# EAGLE board Demo Board v2 (EAGLE 7.4.0)
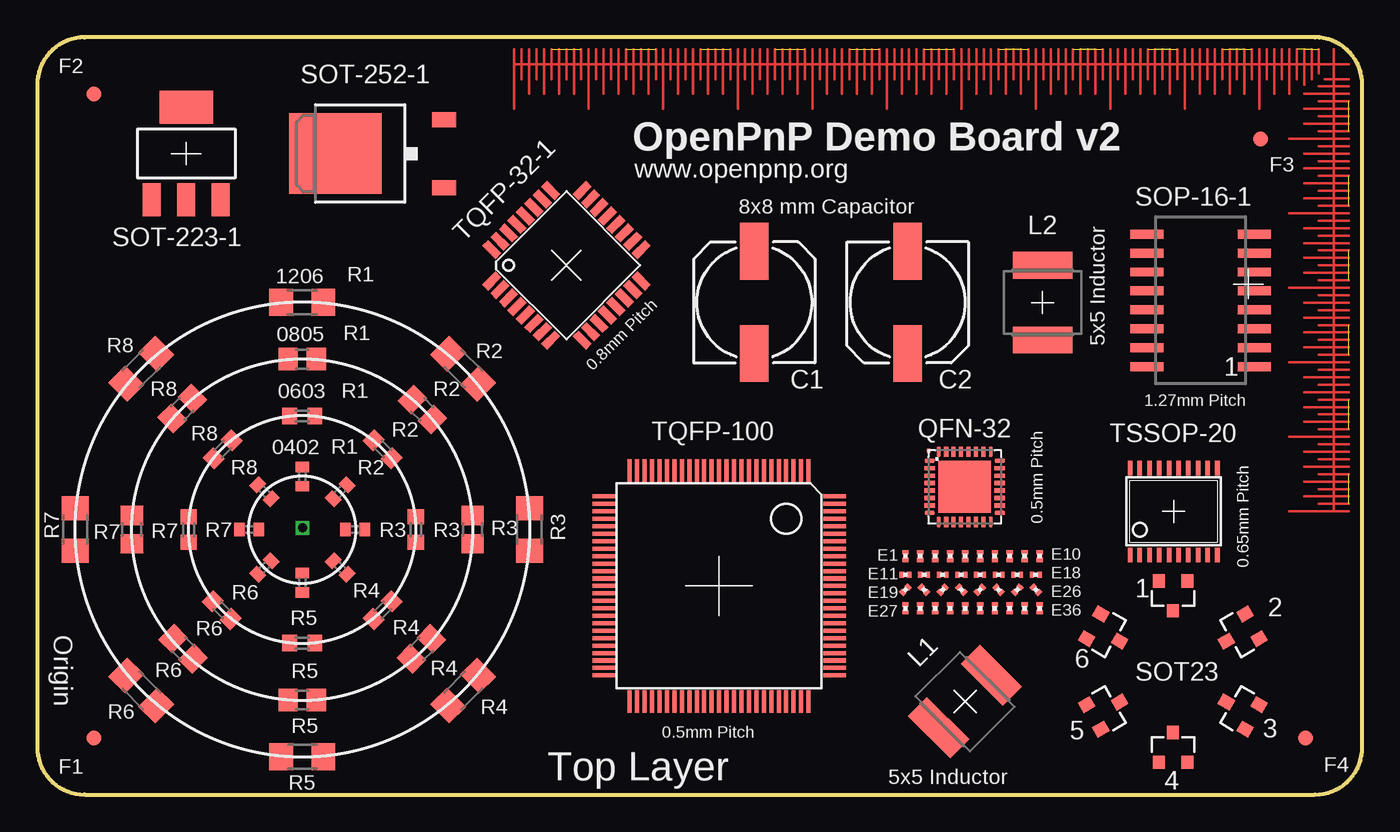
[diagram p0: board, top side]
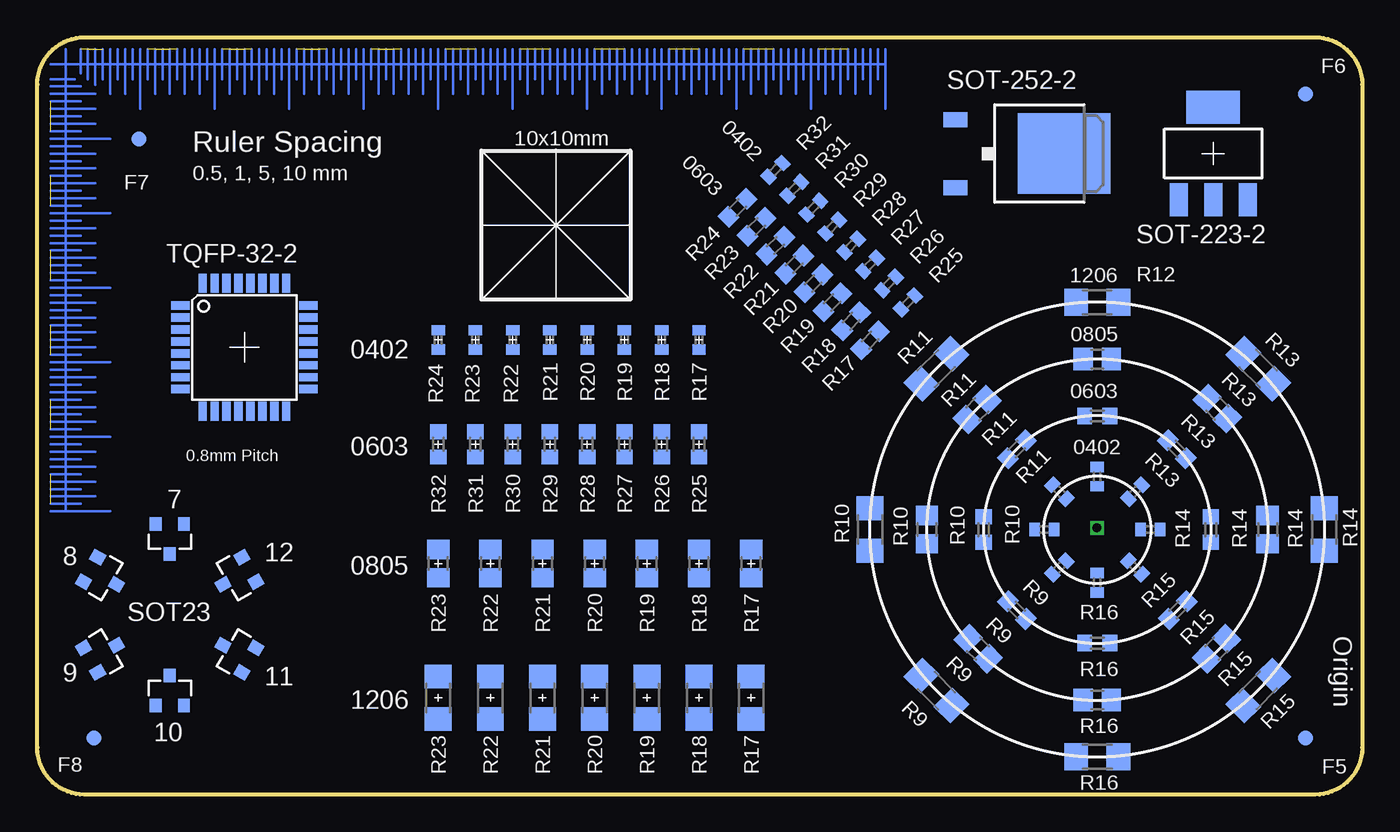
[diagram p1: board, bottom side, seen from below]

Size 88.9 x 50.8 mm. Coordinates in mm from the lower left corner, seen from the top.
Outline: 0,47.62 0,3.17 arc90 3.17,0 85.72,0 arc90 88.9,3.17 88.9,47.62 arc90 85.72,50.8 3.17,50.8 arc90 0,47.62
Copper layers (1*16): Top 0.035mm / dielectric 1.5mm / Bottom 0.035mm
Design rules "SeeedStudio_2layer_DRU_no_angle_20140221": minimum track width 6mil, minimum drill 12mil, track to track 6mil, track to pad 6mil, pad to pad 6mil, via to via 6mil, smd to smd 0mil, copper to edge 10mil, drill to drill 10mil, minimum pad ring 10mil, minimum via ring 6mil, stop-mask expansion 2mil, vias tented up to drill 100mil, thermal gap 10mil

## Footprints (pad centres in the part's own frame; a part is rotated, then mirrored left to right if it is on the bottom)
ELECTRO-SMD-E-7.8MM = smd 3.81 x 1.905: + 3.429,0; - -3.429,0
R0201 = smd 0.28 x 0.43: 1 -0.255,0; 2 0.255,0
FIDUCIAL_1MM = smd 1 x 1: 1 0,0
L5650M = smd 1.8 x 4: 1 -2.5,0; 2 2.5,0
HVQFN32 = smd 0.7 x 0.28: 1 -2.35,1.75; 2 -2.35,1.25; 3 -2.35,0.75; 4 -2.35,0.25; 5 -2.35,-0.25; 6 -2.35,-0.75; 7 -2.35,-1.25; 8 -2.35,-1.75; 17 2.35,-1.75; 18 2.35,-1.25; 19 2.35,-0.75; 20 2.35,-0.25; 21 2.35,0.25; 22 2.35,0.75; 23 2.35,1.25; 24 2.35,1.75 | smd 0.28 x 0.7: 9 -1.75,-2.35; 10 -1.25,-2.35; 11 -0.75,-2.35; 12 -0.25,-2.35; 13 0.25,-2.35; 14 0.75,-2.35; 15 1.25,-2.35; 16 1.75,-2.35; 25 1.75,2.35; 26 1.25,2.35; 27 0.75,2.35; 28 0.25,2.35; 29 -0.25,2.35; 30 -0.75,2.35; 31 -1.25,2.35; 32 -1.75,2.35 | smd 3.5 x 3.5: EXP 0,0 | smd 0.25 x 0.25: M1 -2.415,2.415
R0402 = smd 0.7 x 0.9: 1 -0.65,0; 2 0.65,0
R0603 = smd 1 x 1.1: 1 -0.85,0; 2 0.85,0
R0805 = smd 1.3 x 1.5: 1 -0.95,0; 2 0.95,0
R1206 = smd 1.6 x 1.803: 1 -1.422,0; 2 1.422,0
SOP16 = smd 0.6 x 2.2: 1 -4.445,-3.6; 2 -3.175,-3.6; 3 -1.905,-3.6; 4 -0.635,-3.6; 5 0.635,-3.6; 6 1.905,-3.6; 7 3.175,-3.6; 8 4.445,-3.6; 9 4.445,3.6; 10 3.175,3.6; 11 1.905,3.6; 12 0.635,3.6; 13 -0.635,3.6; 14 -1.905,3.6; 15 -3.175,3.6; 16 -4.445,3.6
SOT23-3 = smd 0.8 x 0.9: 1 -0.95,-1; 2 0.95,-1; 3 0,1
SOT223 = smd 1.219 x 2.235: 1 -2.311,-3.099; 2 0,-3.099; 3 2.311,-3.099 | smd 3.6 x 2.2: 4 0,3.099
TO-252 = smd 1 x 1.6: 1 -2.28,-4.8; 2 2.28,-4.8 | smd 5.4 x 6.2: 3 0,2.5
TQFP32-08 = smd 1.27 x 0.559: 1 -4.293,2.8; 2 -4.293,2; 3 -4.293,1.2; 4 -4.293,0.4; 5 -4.293,-0.4; 6 -4.293,-1.2; 7 -4.293,-2; 8 -4.293,-2.8; 17 4.293,-2.8; 18 4.293,-2; 19 4.293,-1.2; 20 4.293,-0.4; 21 4.293,0.4; 22 4.293,1.2; 23 4.293,2; 24 4.293,2.8 | smd 0.559 x 1.27: 9 -2.8,-4.293; 10 -2,-4.293; 11 -1.2,-4.293; 12 -0.4,-4.293; 13 0.4,-4.293; 14 1.2,-4.293; 15 2,-4.293; 16 2.8,-4.293; 25 2.8,4.293; 26 2,4.293; 27 1.2,4.293; 28 0.4,4.293; 29 -0.4,4.293; 30 -1.2,4.293; 31 -2,4.293; 32 -2.8,4.293
TQFP100 = smd 0.27 x 1.5: 1 -6,-7.75; 2 -5.5,-7.75; 3 -5,-7.75; 4 -4.5,-7.75; 5 -4,-7.75; 6 -3.5,-7.75; 7 -3,-7.75; 8 -2.5,-7.75; 9 -2,-7.75; 10 -1.5,-7.75; 11 -1,-7.75; 12 -0.5,-7.75; 13 0,-7.75; 14 0.5,-7.75; 15 1,-7.75; 16 1.5,-7.75; 17 2,-7.75; 18 2.5,-7.75; 19 3,-7.75; 20 3.5,-7.75; 21 4,-7.75; 22 4.5,-7.75; 23 5,-7.75; 24 5.5,-7.75; 25 6,-7.75; 51 6,7.75; 52 5.5,7.75; 53 5,7.75; 54 4.5,7.75; 55 4,7.75; 56 3.5,7.75; 57 3,7.75; 58 2.5,7.75; 59 2,7.75; 60 1.5,7.75; 61 1,7.75; 62 0.5,7.75; 63 0,7.75; 64 -0.5,7.75; 65 -1,7.75; 66 -1.5,7.75; 67 -2,7.75; 68 -2.5,7.75; 69 -3,7.75; 70 -3.5,7.75; 71 -4,7.75; 72 -4.5,7.75; 73 -5,7.75; 74 -5.5,7.75; 75 -6,7.75 | smd 1.5 x 0.27: 26 7.75,-6; 27 7.75,-5.5; 28 7.75,-5; 29 7.75,-4.5; 30 7.75,-4; 31 7.75,-3.5; 32 7.75,-3; 33 7.75,-2.5; 34 7.75,-2; 35 7.75,-1.5; 36 7.75,-1; 37 7.75,-0.5; 38 7.75,0; 39 7.75,0.5; 40 7.75,1; 41 7.75,1.5; 42 7.75,2; 43 7.75,2.5; 44 7.75,3; 45 7.75,3.5; 46 7.75,4; 47 7.75,4.5; 48 7.75,5; 49 7.75,5.5; 50 7.75,6; 76 -7.75,6; 77 -7.75,5.5; 78 -7.75,5; 79 -7.75,4.5; 80 -7.75,4; 81 -7.75,3.5; 82 -7.75,3; 83 -7.75,2.5; 84 -7.75,2; 85 -7.75,1.5; 86 -7.75,1; 87 -7.75,0.5; 88 -7.75,0; 89 -7.75,-0.5; 90 -7.75,-1; 91 -7.75,-1.5; 92 -7.75,-2; 93 -7.75,-2.5; 94 -7.75,-3; 95 -7.75,-3.5; 96 -7.75,-4; 97 -7.75,-4.5; 98 -7.75,-5; 99 -7.75,-5.5; 100 -7.75,-6
TSSOP20 = smd 0.305 x 0.991: 1 -2.925,-2.918; 2 -2.275,-2.918; 3 -1.625,-2.918; 4 -0.975,-2.918; 5 -0.325,-2.918; 6 0.325,-2.918; 7 0.975,-2.918; 8 1.625,-2.918; 9 2.275,-2.918; 10 2.925,-2.918; 11 2.925,2.918; 12 2.275,2.918; 13 1.625,2.918; 14 0.975,2.918; 15 0.325,2.918; 16 -0.325,2.918; 17 -0.975,2.918; 18 -1.625,2.918; 19 -2.275,2.918; 20 -2.925,2.918

## Placement (x,y rotation side)
BOTTOM_RULER_ORGIN  [REFERENCE_BOTTOM]  87,49 0 bottom
BOTTOM_RULER_ORGIN1  [REFERENCE_BOTTOM]  87,49 0 top
C1  [ELECTRO-SMD-E-7.8MM]  48.11,33.02 90 top
C2  [ELECTRO-SMD-E-7.8MM]  58.4,33.02 270 top
E1  [R0201]  58.25,16 90 top
E10  [R0201]  67.25,16 90 top
E11  [R0201]  58.25,14.75 180 top
E18  [R0201]  67,14.75 180 top
E27  [R0201]  58.25,12.5 90 top
E36  [R0201]  67.25,12.5 90 top
E$2  [R0201]  59.25,16 90 top
E$3  [R0201]  60.25,16 90 top
E$4  [R0201]  61.25,16 90 top
E$5  [R0201]  62.25,16 90 top
E$6  [R0201]  63.25,16 90 top
E$7  [R0201]  64.25,16 90 top
E$8  [R0201]  65.25,16 90 top
E$9  [R0201]  66.25,16 90 top
E$12  [R0201]  59.5,14.75 180 top
E$13  [R0201]  60.75,14.75 180 top
E$14  [R0201]  62,14.75 180 top
E$15  [R0201]  63.25,14.75 180 top
E$16  [R0201]  64.5,14.75 180 top
E$17  [R0201]  65.75,14.75 180 top
E$19  [R0201]  58.25,13.75 45 top
E$20  [R0201]  59.5,13.75 135 top
E$21  [R0201]  60.75,13.75 45 top
E$22  [R0201]  62,13.75 135 top
E$23  [R0201]  63.25,13.75 45 top
E$24  [R0201]  64.5,13.75 135 top
E$25  [R0201]  65.75,13.75 45 top
E$26  [R0201]  67,13.75 135 top
E$28  [R0201]  59.25,12.5 90 top
E$29  [R0201]  60.25,12.5 90 top
E$30  [R0201]  61.25,12.5 90 top
E$31  [R0201]  62.25,12.5 90 top
E$32  [R0201]  63.25,12.5 90 top
E$33  [R0201]  64.25,12.5 90 top
E$34  [R0201]  65.25,12.5 90 top
E$35  [R0201]  66.25,12.5 90 top
FID-1  [FIDUCIAL_1MM]  3.81,3.81 0 top
FID-2  [FIDUCIAL_1MM]  3.81,46.99 0 top
FID-3  [FIDUCIAL_1MM]  82.09,43.99 0 top
FID-4  [FIDUCIAL_1MM]  85.09,3.81 0 top
FID-5  [FIDUCIAL_1MM]  3.81,3.81 0 bottom
FID-6  [FIDUCIAL_1MM]  3.81,46.99 0 bottom
FID-7  [FIDUCIAL_1MM]  82.09,43.99 0 bottom
FID-8  [FIDUCIAL_1MM]  85.09,3.81 0 bottom
L1  [L5650M]  62.25,6.25 45 top
L2  [L5650M]  67.45,33 270 top
QFN-32  [HVQFN32]  62.23,20.65 0 top
R0402-1  [R0402]  17.78,21.34 270 top
R0402-2  [R0402]  20.32,20.32 45 top
R0402-3  [R0402]  21.34,17.78 0 top
R0402-4  [R0402]  20.32,15.24 135 top
R0402-5  [R0402]  17.78,14.22 90 top
R0402-6  [R0402]  15.24,15.24 45 top
R0402-7  [R0402]  14.22,17.78 180 top
R0402-8  [R0402]  15.24,20.32 135 top
R0402-9  [R0402]  20.32,15.24 45 bottom
R0402-10  [R0402]  21.34,17.78 0 bottom
R0402-11  [R0402]  20.32,20.32 315 bottom
R0402-12  [R0402]  17.78,21.34 270 bottom
R0402-13  [R0402]  15.24,20.32 45 bottom
R0402-14  [R0402]  14.22,17.78 180 bottom
R0402-15  [R0402]  15.24,15.24 315 bottom
R0402-16  [R0402]  17.78,14.22 90 bottom
R0402-17  [R0402]  44.5,30.5 270 bottom
R0402-18  [R0402]  47,30.5 270 bottom
R0402-19  [R0402]  49.5,30.5 270 bottom
R0402-20  [R0402]  52,30.5 270 bottom
R0402-21  [R0402]  54.5,30.5 270 bottom
R0402-22  [R0402]  57,30.5 270 bottom
R0402-23  [R0402]  59.5,30.5 270 bottom
R0402-24  [R0402]  62,30.5 270 bottom
R0402-25  [R0402]  30.48,33.02 225 bottom
R0402-26  [R0402]  31.75,34.29 225 bottom
R0402-27  [R0402]  33.02,35.56 225 bottom
R0402-28  [R0402]  34.29,36.83 225 bottom
R0402-29  [R0402]  35.56,38.1 225 bottom
R0402-30  [R0402]  36.83,39.37 225 bottom
R0402-31  [R0402]  38.1,40.64 225 bottom
R0402-32  [R0402]  39.37,41.91 225 bottom
R0603-1  [R0603]  17.78,25.4 180 top
R0603-2  [R0603]  23.18,23.18 135 top
R0603-3  [R0603]  25.4,17.78 270 top
R0603-4  [R0603]  23.18,12.38 225 top
R0603-5  [R0603]  17.78,10.16 180 top
R0603-6  [R0603]  12.38,12.38 315 top
R0603-7  [R0603]  10.16,17.78 270 top
R0603-8  [R0603]  12.45,23.18 45 top
R0603-9  [R0603]  23.18,12.38 135 bottom
R0603-10  [R0603]  25.4,17.78 270 bottom
R0603-11  [R0603]  23.18,23.18 45 bottom
R0603-12  [R0603]  17.78,25.4 180 bottom
R0603-13  [R0603]  12.45,23.18 315 bottom
R0603-14  [R0603]  10.16,17.78 270 bottom
R0603-15  [R0603]  12.38,12.38 225 bottom
R0603-16  [R0603]  17.78,10.16 180 bottom
R0603-17  [R0603]  33.02,30.48 45 bottom
R0603-18  [R0603]  34.29,31.75 45 bottom
R0603-19  [R0603]  35.56,33.02 45 bottom
R0603-20  [R0603]  36.83,34.29 45 bottom
R0603-21  [R0603]  38.1,35.56 45 bottom
R0603-22  [R0603]  39.37,36.83 45 bottom
R0603-23  [R0603]  40.64,38.1 45 bottom
R0603-24  [R0603]  41.91,39.37 45 bottom
R0603-25  [R0603]  44.5,23.5 270 bottom
R0603-26  [R0603]  47,23.5 270 bottom
R0603-27  [R0603]  49.5,23.5 270 bottom
R0603-28  [R0603]  52,23.5 270 bottom
R0603-29  [R0603]  54.5,23.5 270 bottom
R0603-30  [R0603]  57,23.5 270 bottom
R0603-31  [R0603]  59.5,23.5 270 bottom
R0603-32  [R0603]  62,23.5 270 bottom
R0805-1  [R0805]  17.78,29.21 180 top
R0805-2  [R0805]  25.84,25.84 315 top
R0805-3  [R0805]  29.21,17.78 270 top
R0805-4  [R0805]  25.77,9.79 225 top
R0805-5  [R0805]  17.78,6.35 0 top
R0805-6  [R0805]  9.79,9.79 135 top
R0805-7  [R0805]  6.35,17.78 90 top
R0805-8  [R0805]  9.72,25.9 45 top
R0805-9  [R0805]  25.77,9.79 135 bottom
R0805-10  [R0805]  29.21,17.78 270 bottom
R0805-11  [R0805]  25.84,25.84 225 bottom
R0805-12  [R0805]  17.78,29.21 180 bottom
R0805-13  [R0805]  9.72,25.9 315 bottom
R0805-14  [R0805]  6.35,17.78 90 bottom
R0805-15  [R0805]  9.79,9.79 45 bottom
R0805-16  [R0805]  17.78,6.35 0 bottom
R0805-17  [R0805]  41,15.5 270 bottom
R0805-18  [R0805]  44.5,15.5 270 bottom
R0805-19  [R0805]  48,15.5 270 bottom
R0805-20  [R0805]  51.5,15.5 270 bottom
R0805-21  [R0805]  55,15.5 270 bottom
R0805-22  [R0805]  58.5,15.5 270 bottom
R0805-23  [R0805]  62,15.5 270 bottom
R1206-1  [R1206]  17.78,33.02 0 top
R1206-2  [R1206]  28.57,28.57 135 top
R1206-3  [R1206]  33.02,17.78 90 top
R1206-4  [R1206]  28.57,6.99 225 top
R1206-5  [R1206]  17.78,2.54 180 top
R1206-6  [R1206]  6.99,6.99 315 top
R1206-7  [R1206]  2.54,17.78 270 top
R1206-8  [R1206]  6.99,28.57 45 top
R1206-9  [R1206]  28.57,6.99 135 bottom
R1206-10  [R1206]  33.02,17.78 90 bottom
R1206-11  [R1206]  28.57,28.57 45 bottom
R1206-12  [R1206]  17.78,33.02 0 bottom
R1206-13  [R1206]  6.99,28.57 315 bottom
R1206-14  [R1206]  2.54,17.78 270 bottom
R1206-15  [R1206]  6.99,6.99 225 bottom
R1206-16  [R1206]  17.78,2.54 180 bottom
R1206-17  [R1206]  41,6.5 90 bottom
R1206-18  [R1206]  44.5,6.5 90 bottom
R1206-19  [R1206]  48,6.5 90 bottom
R1206-20  [R1206]  51.5,6.5 90 bottom
R1206-21  [R1206]  55,6.5 90 bottom
R1206-22  [R1206]  58.5,6.5 90 bottom
R1206-23  [R1206]  62,6.5 90 bottom
SOP-16-1  [SOP16]  78.05,33.15 90 top
SOT-23-1  [SOT23-3]  76.2,13.34 180 top
SOT-23-2  [SOT23-3]  80.64,10.79 120 top
SOT-23-3  [SOT23-3]  80.64,5.71 60 top
SOT-23-4  [SOT23-3]  76.2,3.17 0 top
SOT-23-5  [SOT23-3]  71.75,5.71 300 top
SOT-23-6  [SOT23-3]  71.75,10.79 240 top
SOT-23-7  [SOT23-3]  80.01,17.14 180 bottom
SOT-23-8  [SOT23-3]  84.45,14.61 240 bottom
SOT-23-9  [SOT23-3]  84.45,9.53 300 bottom
SOT-23-10  [SOT23-3]  80.01,6.99 0 bottom
SOT-23-11  [SOT23-3]  75.56,9.53 60 bottom
SOT-23-12  [SOT23-3]  75.56,14.61 120 bottom
SOT-223-1  [SOT223]  10,43 0 top
SOT-223-2  [SOT223]  10,43 0 bottom
SOT-251-2  [TO-252]  22.5,43 270 bottom
SOT-252-1  [TO-252]  22.5,43 90 top
TQFP-32-1  [TQFP32-08]  35.5,35.5 45 top
TQFP-32-2  [TQFP32-08]  75,30 0 bottom
TQFP-100  [TQFP100]  45.75,14 180 top
TSSOP-20  [TSSOP20]  76.25,19 0 top

## Library data of the parts
BOTTOM_RULER_ORGIN BOTTOM_RULER_ORGIN1 QFN-32 R1206-1-R1206-23 SOP-16-1 TQFP-32-1 TQFP-32-2 TQFP-100 TSSOP-20 = ref-packages
C1 C2 = Seeed-OPL-Capacitor
E1 E10 E11 E18 E27 E36 E$2-E$9 E$12-E$17 E$19-E$26 E$28-E$35 R0402-1-R0402-32 R0603-1-R0603-32 R0805-1-R0805-23 = rcl
FID-1-FID-8 = adafruit
L1 L2 = resistor
SOT-23-1-SOT-23-12 = GeekAmmo
SOT-223-1 SOT-223-2 SOT-251-2 SOT-252-1 = SparkFun-PowerIC

## Tracks (layer width: path | path; a pad name or v marks a point on that pad's centre or on a via)
S$1
  Bottom 0.154: 32,50 32,49 | 32,49 32,46 | 32,49 88,49
S$2
  Bottom 0.154: 33,50 33,47
S$3
  Bottom 0.154: 33.5,50 33.5,48
S$4
  Bottom 0.154: 34,50 34,47
S$5  (2 unrouted)
  Bottom 0.154: 34.5,50 34.5,48 | 35.5,50 35.5,48 | 36.5,50 36.5,48
S$6  (1 unrouted)
  Bottom 0.154: 35,50 35,47 | 36,50 36,47
S$7
  Bottom 0.154: 32.5,50 32.5,48
S$8
  Bottom 0.154: 37,50 37,46
S$9
  Bottom 0.154: 37.5,50 37.5,48
S$10
  Bottom 0.154: 38,50 38,47
S$11
  Bottom 0.154: 38.5,50 38.5,48
S$12
  Bottom 0.154: 39,50 39,47
S$13  (2 unrouted)
  Bottom 0.154: 39.5,50 39.5,48 | 40.5,50 40.5,48 | 41.5,50 41.5,48
S$14  (1 unrouted)
  Bottom 0.154: 40,50 40,47 | 41,50 41,47
S$15
  Bottom 0.154: 42,50 42,46
S$16
  Bottom 0.154: 42.5,50 42.5,48
S$17
  Bottom 0.154: 43,50 43,47
S$18
  Bottom 0.154: 43.5,50 43.5,48
S$19
  Bottom 0.154: 44,50 44,47
S$20  (2 unrouted)
  Bottom 0.154: 44.5,50 44.5,48 | 45.5,50 45.5,48 | 46.5,50 46.5,48
S$21  (1 unrouted)
  Bottom 0.154: 45,50 45,47 | 46,50 46,47
S$22
  Bottom 0.154: 47,50 47,46
S$23
  Bottom 0.154: 47.5,50 47.5,48
S$24
  Bottom 0.154: 48,50 48,47
S$25
  Bottom 0.154: 48.5,50 48.5,48
S$26
  Bottom 0.154: 49,50 49,47
S$27  (2 unrouted)
  Bottom 0.154: 49.5,50 49.5,48 | 50.5,50 50.5,48 | 51.5,50 51.5,48
S$28  (1 unrouted)
  Bottom 0.154: 50,50 50,47 | 51,50 51,47
S$29
  Bottom 0.154: 52,50 52,46
S$30
  Bottom 0.154: 52.5,50 52.5,48
S$31
  Bottom 0.154: 53,50 53,47
S$32
  Bottom 0.154: 53.5,50 53.5,48
S$33
  Bottom 0.154: 54,50 54,47
S$34  (2 unrouted)
  Bottom 0.154: 54.5,50 54.5,48 | 55.5,50 55.5,48 | 56.5,50 56.5,48
S$35  (1 unrouted)
  Bottom 0.154: 55,50 55,47 | 56,50 56,47
S$36
  Bottom 0.154: 57,50 57,46
S$37
  Bottom 0.154: 57.5,50 57.5,48
S$38
  Bottom 0.154: 58,50 58,47
S$39
  Bottom 0.154: 58.5,50 58.5,48
S$40
  Bottom 0.154: 59,50 59,47
S$41  (2 unrouted)
  Bottom 0.154: 59.5,50 59.5,48 | 60.5,50 60.5,48 | 61.5,50 61.5,48
S$42  (1 unrouted)
  Bottom 0.154: 60,50 60,47 | 61,50 61,47
S$43
  Bottom 0.154: 62,50 62,46
S$44
  Bottom 0.154: 62.5,50 62.5,48
S$45
  Bottom 0.154: 63,50 63,47
S$46
  Bottom 0.154: 63.5,50 63.5,48
S$47
  Bottom 0.154: 64,50 64,47
S$48  (2 unrouted)
  Bottom 0.154: 64.5,50 64.5,48 | 65.5,50 65.5,48 | 66.5,50 66.5,48
S$49  (1 unrouted)
  Bottom 0.154: 65,50 65,47 | 66,50 66,47
S$50
  Bottom 0.154: 67,50 67,46
S$51
  Bottom 0.154: 67.5,50 67.5,48
S$52
  Bottom 0.154: 68,50 68,47
S$53
  Bottom 0.154: 68.5,50 68.5,48
S$54
  Bottom 0.154: 69,50 69,47
S$55  (2 unrouted)
  Bottom 0.154: 69.5,50 69.5,48 | 70.5,50 70.5,48 | 71.5,50 71.5,48
S$56  (1 unrouted)
  Bottom 0.154: 70,50 70,47 | 71,50 71,47
S$57
  Bottom 0.154: 72,50 72,46
S$58
  Bottom 0.154: 72.5,50 72.5,48
S$59
  Bottom 0.154: 73,50 73,47
S$60
  Bottom 0.154: 73.5,50 73.5,48
S$61
  Bottom 0.154: 74,50 74,47
S$62  (2 unrouted)
  Bottom 0.154: 74.5,50 74.5,48 | 75.5,50 75.5,48 | 76.5,50 76.5,48
S$63  (1 unrouted)
  Bottom 0.154: 75,50 75,47 | 76,50 76,47
S$64
  Bottom 0.154: 77,50 77,46
S$65
  Bottom 0.154: 77.5,50 77.5,48
S$66
  Bottom 0.154: 78,50 78,47
S$67
  Bottom 0.154: 78.5,50 78.5,48
S$68
  Bottom 0.154: 79,50 79,47
S$69  (2 unrouted)
  Bottom 0.154: 79.5,50 79.5,48 | 80.5,50 80.5,48 | 81.5,50 81.5,48
S$70  (1 unrouted)
  Bottom 0.154: 80,50 80,47 | 81,50 81,47
S$71
  Bottom 0.154: 82,50 82,46
S$72
  Bottom 0.154: 82.5,50 82.5,48
S$73
  Bottom 0.154: 83,50 83,47
S$74
  Bottom 0.154: 83.5,50 83.5,48
S$75
  Bottom 0.154: 84,50 84,47
S$76  (1 unrouted)
  Bottom 0.154: 84.5,50 84.5,48 | 85.5,50 85.5,48
S$77  (1 unrouted)
  Bottom 0.154: 85,50 85,47.6 | 86,50 86,48.4
S$78
  Bottom 0.154: 88,49 87,49 | 87,49 84,49 | 87,49 87,19.1 | 87,49 87,50
S$79
  Top 0.154: 32,50 32,46
S$80
  Bottom 0.154: 88,48 86.4,48
S$81
  Bottom 0.154: 88,47.5 86,47.5
S$82
  Bottom 0.154: 88,47 85,47
S$83  (2 unrouted)
  Bottom 0.154: 88,46.5 86,46.5 | 88,45.5 86,45.5 | 88,44.5 86,44.5
S$84  (1 unrouted)
  Bottom 0.154: 88,46 85,46 | 88,45 85,45
S$85
  Bottom 0.154: 88,44 84,44
S$86
  Bottom 0.154: 88,43.5 86,43.5
S$87
  Bottom 0.154: 88,43 85,43
S$88
  Bottom 0.154: 88,42.5 86,42.5
S$89
  Bottom 0.154: 88,42 85,42
S$90  (2 unrouted)
  Bottom 0.154: 88,41.5 86,41.5 | 88,40.5 86,40.5 | 88,39.5 86,39.5
S$91  (1 unrouted)
  Bottom 0.154: 88,41 85,41 | 88,40 85,40
S$92
  Bottom 0.154: 88,39 84,39
S$93
  Bottom 0.154: 88,38.5 86,38.5
S$94
  Bottom 0.154: 88,38 85,38
S$95
  Bottom 0.154: 88,37.5 86,37.5
S$96
  Bottom 0.154: 88,37 85,37
S$97  (2 unrouted)
  Bottom 0.154: 88,36.5 86,36.5 | 88,35.5 86,35.5 | 88,34.5 86,34.5
S$98  (1 unrouted)
  Bottom 0.154: 88,36 85,36 | 88,35 85,35
S$99
  Bottom 0.154: 88,34 84,34
S$100
  Bottom 0.154: 88,33.5 86,33.5
S$101
  Bottom 0.154: 88,33 85,33
S$102
  Bottom 0.154: 88,32.5 86,32.5
S$103
  Bottom 0.154: 88,32 85,32
S$104  (2 unrouted)
  Bottom 0.154: 88,31.5 86,31.5 | 88,30.5 86,30.5 | 88,29.5 86,29.5
S$105  (1 unrouted)
  Bottom 0.154: 88,31 85,31 | 88,30 85,30
S$106
  Bottom 0.154: 88,29 84,29
S$107
  Bottom 0.154: 88,28.5 86,28.5
S$108
  Bottom 0.154: 88,28 85,28
S$109
  Bottom 0.154: 88,27.5 86,27.5
S$110
  Bottom 0.154: 88,27 85,27
S$111  (2 unrouted)
  Bottom 0.154: 88,26.5 86,26.5 | 88,25.5 86,25.5 | 88,24.5 86,24.5
S$112  (1 unrouted)
  Bottom 0.154: 88,26 85,26 | 88,25 85,25
S$113
  Bottom 0.154: 88,24 84,24
S$114
  Bottom 0.154: 88,23.5 86,23.5
S$115
  Bottom 0.154: 88,23 85,23
S$116
  Bottom 0.154: 88,22.5 86,22.5
S$117
  Bottom 0.154: 88,22 85,22
S$118  (2 unrouted)
  Bottom 0.154: 88,21.5 86,21.5 | 88,20.5 86,20.5 | 88,19.5 86,19.5
S$119  (1 unrouted)
  Bottom 0.154: 88,21 85,21 | 88,20 85,20
S$120
  Bottom 0.154: 88,19 84,19
S$121
  Top 0.154: 32.5,50 32.5,48
S$122
  Top 0.154: 33,50 33,47
S$123
  Top 0.154: 33.5,50 33.5,48
S$124
  Top 0.154: 34,50 34,47
S$125
  Top 0.154: 34.5,50 34.5,48
S$126
  Top 0.154: 35,50 35,47
S$127
  Top 0.154: 35.5,50 35.5,48
S$128
  Top 0.154: 36,50 36,47
S$129
  Top 0.154: 36.5,50 36.5,48
S$130
  Top 0.154: 37,50 37,46
S$131
  Top 0.154: 37.5,50 37.5,48
S$132
  Top 0.154: 38,50 38,47
S$133
  Top 0.154: 38.5,50 38.5,48
S$134
  Top 0.154: 39,50 39,47
S$135
  Top 0.154: 39.5,50 39.5,48
S$136
  Top 0.154: 40,50 40,47
S$137
  Top 0.154: 40.5,50 40.5,48
S$138
  Top 0.154: 41,50 41,47
S$139
  Top 0.154: 41.5,50 41.5,48
S$140
  Top 0.154: 42,50 42,46
S$141
  Top 0.154: 42.5,50 42.5,48
S$142
  Top 0.154: 43,50 43,47
S$143
  Top 0.154: 43.5,50 43.5,48
S$144
  Top 0.154: 44,50 44,47
S$145
  Top 0.154: 44.5,50 44.5,48
S$146
  Top 0.154: 45,50 45,47
S$147
  Top 0.154: 45.5,50 45.5,48
S$148
  Top 0.154: 46,50 46,47
S$149
  Top 0.154: 46.5,50 46.5,48
S$150
  Top 0.154: 47,50 47,46
S$151
  Top 0.154: 47.5,50 47.5,48
S$152
  Top 0.154: 48,50 48,47
S$153
  Top 0.154: 48.5,50 48.5,48
S$154
  Top 0.154: 49,50 49,47
S$155
  Top 0.154: 49.5,50 49.5,48
S$156
  Top 0.154: 50,50 50,47
S$157
  Top 0.154: 50.5,50 50.5,48
S$158
  Top 0.154: 51,50 51,47
S$159
  Top 0.154: 51.5,50 51.5,48
S$160
  Top 0.154: 52,50 52,46
S$161
  Top 0.154: 52.5,50 52.5,48
S$162
  Top 0.154: 53,50 53,47
S$163
  Top 0.154: 53.5,50 53.5,48
S$164
  Top 0.154: 54,50 54,47
S$165
  Top 0.154: 54.5,50 54.5,48
S$166
  Top 0.154: 55,50 55,47
S$167
  Top 0.154: 55.5,50 55.5,48
S$168
  Top 0.154: 56,50 56,47
S$169
  Top 0.154: 56.5,50 56.5,48
S$170
  Top 0.154: 57,50 57,46
S$171
  Top 0.154: 57.5,50 57.5,48
S$172
  Top 0.154: 58,50 58,47
S$173
  Top 0.154: 58.5,50 58.5,48
S$174
  Top 0.154: 59,50 59,47
S$175
  Top 0.154: 59.5,50 59.5,48
S$176
  Top 0.154: 60,50 60,47
S$177
  Top 0.154: 60.5,50 60.5,48
S$178
  Top 0.154: 61,50 61,47
S$179
  Top 0.154: 61.5,50 61.5,48
S$180
  Top 0.154: 62,50 62,46
S$181
  Top 0.154: 62.5,50 62.5,48
S$182
  Top 0.154: 63,50 63,47
S$183
  Top 0.154: 63.5,50 63.5,48
S$184
  Top 0.154: 64,50 64,47
S$185
  Top 0.154: 64.5,50 64.5,48
S$186
  Top 0.154: 65,50 65,47
S$187
  Top 0.154: 65.5,50 65.5,48
S$188
  Top 0.154: 66,50 66,47
S$189
  Top 0.154: 66.5,50 66.5,48
S$190
  Top 0.154: 67,50 67,46
S$191
  Top 0.154: 67.5,50 67.5,48
S$192
  Top 0.154: 68,50 68,47
S$193
  Top 0.154: 68.5,50 68.5,48
S$194
  Top 0.154: 69,50 69,47
S$195
  Top 0.154: 69.5,50 69.5,48
S$196
  Top 0.154: 70,50 70,47
S$197
  Top 0.154: 70.5,50 70.5,48
S$198
  Top 0.154: 71,50 71,47
S$199
  Top 0.154: 71.5,50 71.5,48
S$200
  Top 0.154: 72,50 72,46
S$201
  Top 0.154: 72.5,50 72.5,48
S$202
  Top 0.154: 73,50 73,47
S$203
  Top 0.154: 73.5,50 73.5,48
S$204
  Top 0.154: 74,50 74,47
S$205
  Top 0.154: 74.5,50 74.5,48
S$206
  Top 0.154: 75,50 75,47
S$207
  Top 0.154: 75.5,50 75.5,48
S$208
  Top 0.154: 76,50 76,47
S$209
  Top 0.154: 76.5,50 76.5,48
S$210
  Top 0.154: 77,50 77,46
S$211
  Top 0.154: 77.5,50 77.5,48
S$212
  Top 0.154: 78,50 78,47
S$213
  Top 0.154: 78.5,50 78.5,48
S$214
  Top 0.154: 79,50 79,47
S$215
  Top 0.154: 79.5,50 79.5,48
S$216
  Top 0.154: 80,50 80,47
S$217
  Top 0.154: 80.5,50 80.5,48
S$218
  Top 0.154: 81,50 81,47
S$219
  Top 0.154: 81.5,50 81.5,48
S$220
  Top 0.154: 82,50 82,46
S$221
  Top 0.154: 88,28.5 86,28.5
S$222
  Top 0.154: 88,28 85,28
S$223
  Top 0.154: 88,27.5 86,27.5
S$224
  Top 0.154: 88,27 85,27
S$225
  Top 0.154: 88,26.5 86,26.5
S$226
  Top 0.154: 88,26 85,26
S$227
  Top 0.154: 88,25.5 86,25.5
S$228
  Top 0.154: 88,25 85,25
S$229
  Top 0.154: 88,24.5 86,24.5
S$230
  Top 0.154: 88,24 84,24
S$231
  Top 0.154: 88,23.5 86,23.5
S$232
  Top 0.154: 88,23 85,23
S$233
  Top 0.154: 88,22.5 86,22.5
S$234
  Top 0.154: 88,22 85,22
S$235
  Top 0.154: 88,21.5 86,21.5
S$236
  Top 0.154: 88,21 85,21
S$237
  Top 0.154: 88,20.5 86,20.5
S$238
  Top 0.154: 88,20 85,20
S$239
  Top 0.154: 88,19.5 86,19.5
S$240
  Top 0.154: 88,19 87,19 | 87,19 84,19 | 87,50 87,19
S$241
  Top 0.154: 88,38.5 86,38.5
S$242
  Top 0.154: 88,38 85,38
S$243
  Top 0.154: 88,37.5 86,37.5
S$244
  Top 0.154: 88,37 85,37
S$245
  Top 0.154: 88,36.5 86,36.5
S$246
  Top 0.154: 88,36 85,36
S$247
  Top 0.154: 88,35.5 86,35.5
S$248
  Top 0.154: 88,35 85,35
S$249
  Top 0.154: 88,34.5 86,34.5
S$250
  Top 0.154: 88,34 84,34
S$251
  Top 0.154: 88,33.5 86,33.5
S$252
  Top 0.154: 88,33 85,33
S$253
  Top 0.154: 88,32.5 86,32.5
S$254
  Top 0.154: 88,32 85,32
S$255
  Top 0.154: 88,31.5 86,31.5
S$256
  Top 0.154: 88,31 85,31
S$257
  Top 0.154: 88,30.5 86,30.5
S$258
  Top 0.154: 88,30 85,30
S$259
  Top 0.154: 88,29.5 86,29.5
S$260
  Top 0.154: 88,29 84,29
S$261
  Top 0.154: 82.5,50 82.5,48
S$262
  Top 0.154: 88,48 86.4,48
S$263
  Top 0.154: 88,47.5 86,47.5
S$264
  Top 0.154: 88,47 85,47
S$265
  Top 0.154: 88,46.5 86,46.5
S$266
  Top 0.154: 88,46 85,46
S$267
  Top 0.154: 88,45.5 86,45.5
S$268
  Top 0.154: 88,45 85,45
S$269
  Top 0.154: 88,44.5 86,44.5
S$270
  Top 0.154: 88,44 84,44
S$271
  Top 0.154: 88,43.5 86,43.5
S$272
  Top 0.154: 88,43 85,43
S$273
  Top 0.154: 88,42.5 86,42.5
S$274
  Top 0.154: 88,42 85,42
S$275
  Top 0.154: 88,41.5 86,41.5
S$276
  Top 0.154: 88,41 85,41
S$277
  Top 0.154: 88,40.5 86,40.5
S$278
  Top 0.154: 88,40 85,40
S$279
  Top 0.154: 88,39.5 86,39.5
S$280
  Top 0.154: 88,39 84,39
S$281
  Top 0.154: 83,50 83,47
S$282
  Top 0.154: 83.5,50 83.5,48
S$283
  Top 0.154: 84,50 84,47
S$284
  Top 0.154: 84.5,50 84.5,48
S$285
  Top 0.154: 85,50 85,47.6
S$286
  Top 0.154: 85.5,50 85.5,48
S$287
  Top 0.154: 86,50 86,48.4
S$288
  Top 0.154: 32.1,49 88,49
S$289  (via drill 0.6)
  other vias: 17.8,17.9

## Text on the board
tPlace: F2 | F3 | 8x8 mm Capacitor | L2 | 5x5 Inductor | C1 | C2 | E1 | E10 | E11 | E19 | E18 | E27 | E26 | 1 | E36 | 2 | Origin | L1 | 6 | 5 | 3 | F4 | F1 | Top Layer | 5x5 Inductor | 4
bPlace: F6 | 0402 | 10x10mm | Ruler Spacing | 0603 | 0.5, 1, 5, 10 mm | F7 | 0402 | 0603 | 7 | 0805 | 12 | 8 | SOT23 | Origin | 9 | 1206 | 11 | 10 | F8 | F5
tNames: SOT-252-1 | TQFP-32-1 | OpenPnP Demo Board v2 | www.openpnp.org | SOP-16-1 | SOT-223-1 | 1206 | R1 | R8 | 0805 | R1 | R2 | 0.8mm Pitch | R8 | 0603 | R1 | R2 | 1.27mm Pitch | R8 | R2 | TQFP-100 | QFN-32 | TSSOP-20 | 0402 | R1 | R8 | R2 | 0.5mm Pitch | R7 | R7 | R7 | R7 | R3 | R3 | R3 | R3 | 0.65mm Pitch | R6 | R4 | R6 | R5 | R4 | R6 | R5 | R4 | SOT23 | R6 | R4 | R5 | 0.5mm Pitch | R5
bNames: SOT-252-2 | R32 | R31 | R30 | R29 | R28 | SOT-223-2 | R27 | R24 | TQFP-32-2 | R26 | R12 | 1206 | R25 | R23 | R22 | R21 | R20 | R13 | 0805 | R19 | R11 | R17 | R18 | R19 | R20 | R21 | R22 | R23 | R24 | R13 | R18 | 0603 | R17 | R11 | R13 | 0402 | R11 | R13 | R25 | R26 | R27 | R28 | R29 | R30 | R31 | R32 | 0.8mm Pitch | R11 | R14 | R14 | R14 | R14 | R10 | R10 | R10 | R10 | R9 | R17 | R18 | R19 | R20 | R21 | R22 | R23 | R15 | R16 | R9 | R15 | R9 | R16 | R15 | R9 | R15 | R16 | R17 | R18 | R19 | R20 | R21 | R22 | R23 | R16